# EAGLE board board-newparts-toextract (EAGLE 9.5.2), part 1 of 2
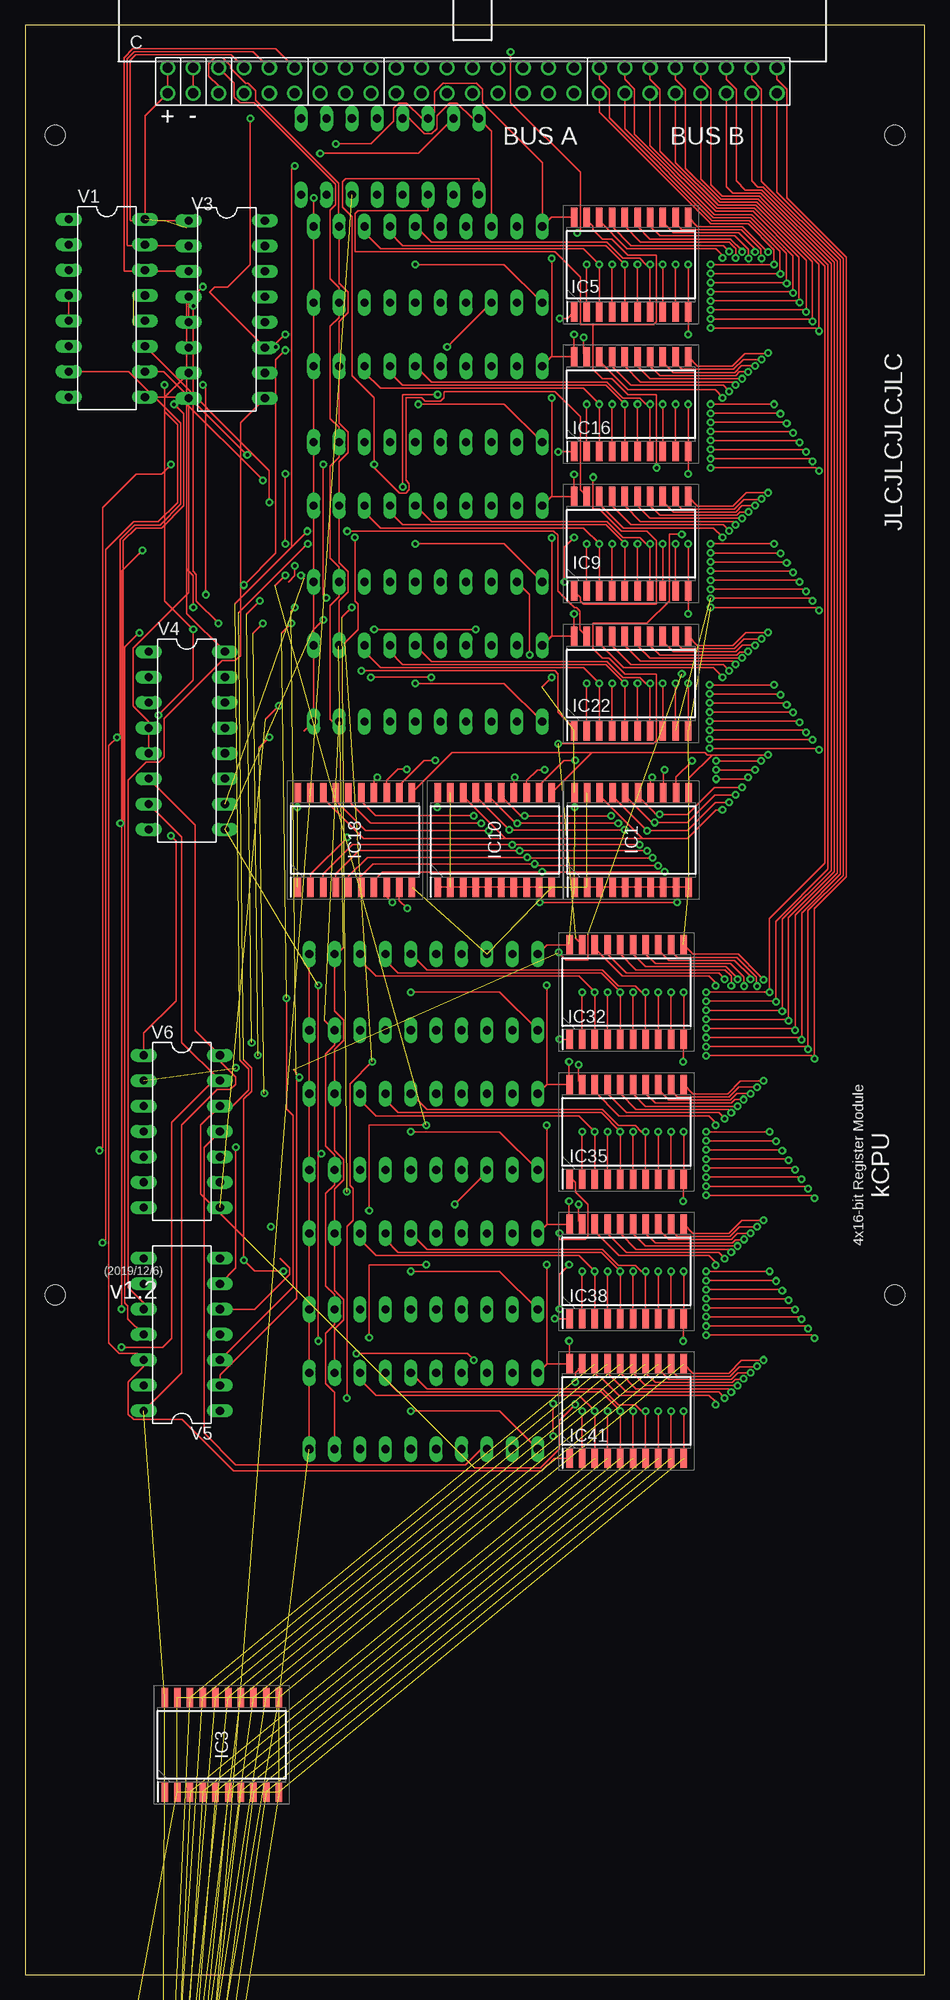
[diagram p0: board, top side]
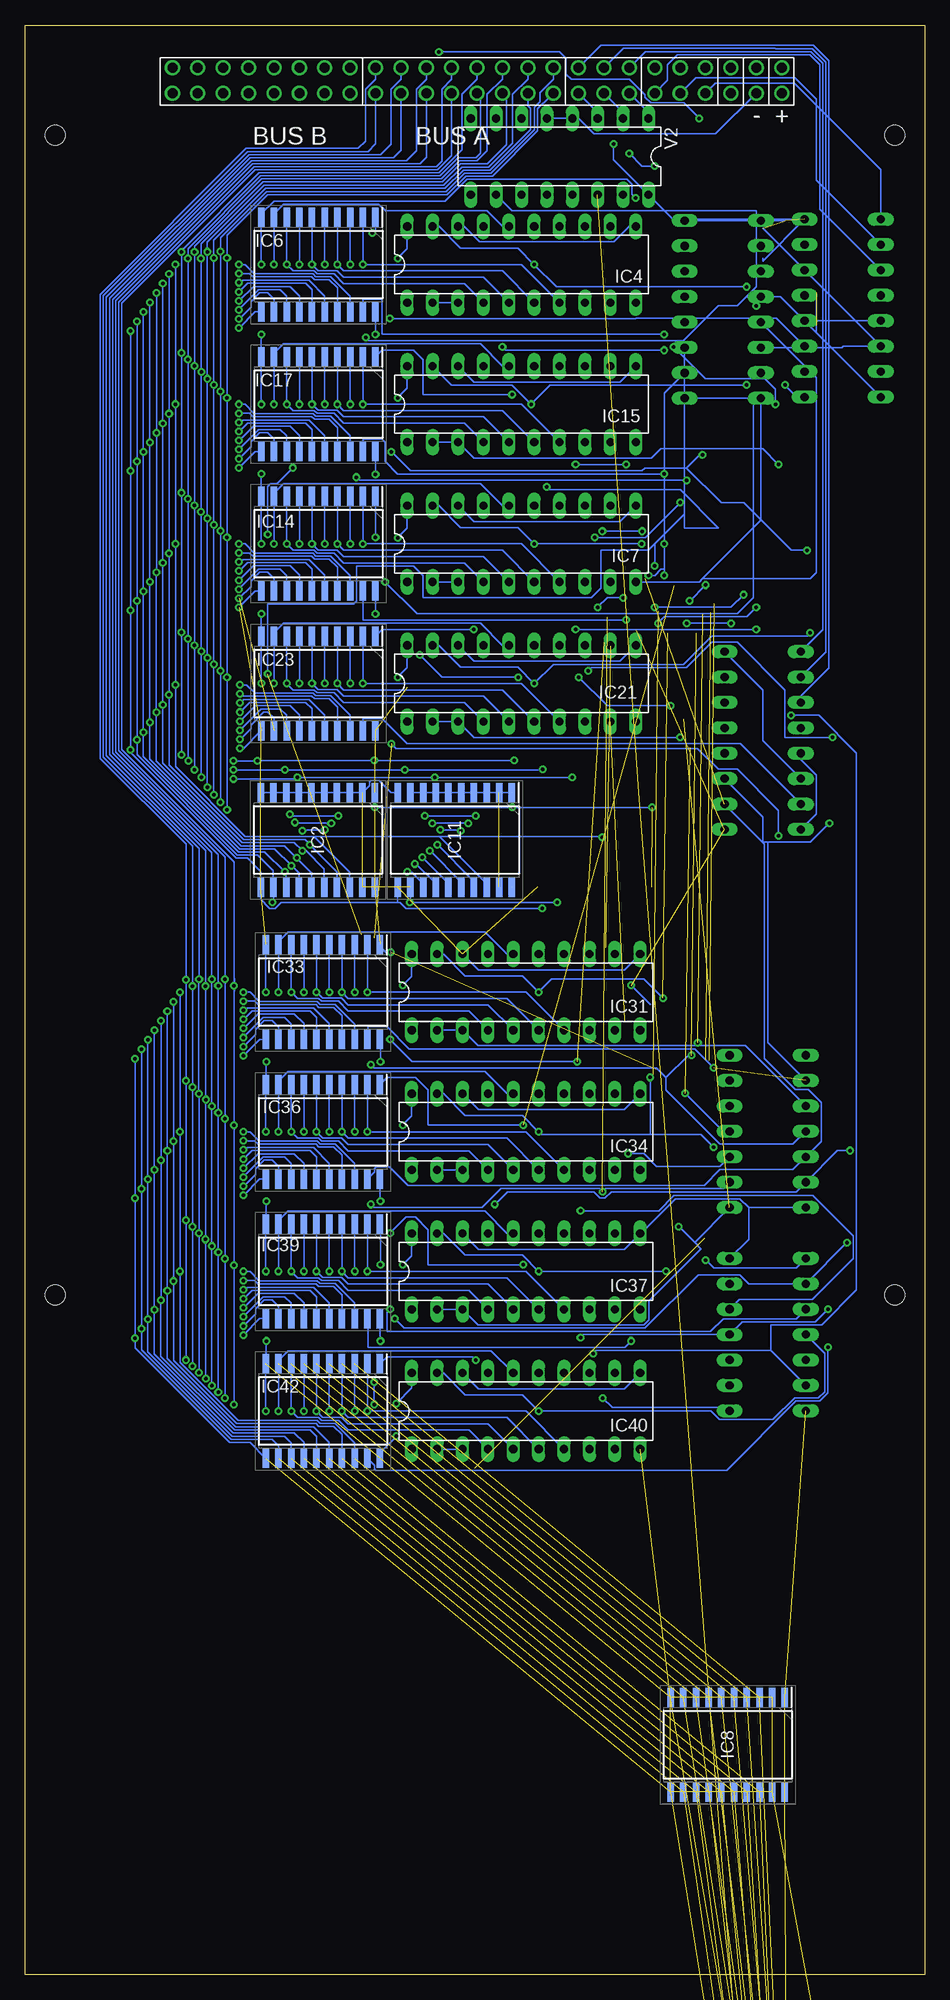
[diagram p1: board, bottom side, seen from below]

Size 90 x 195 mm. Coordinates in mm from the lower left corner, seen from the top.
Outline: 0,0 90,0 90,195 0,195 0,0
Copper layers (1*16): Top 0.035mm / dielectric 1.5mm / Bottom 0.035mm
Design rules "default *": minimum track width 6mil, minimum drill 0.35mm, track to track 6mil, track to pad 6mil, pad to pad 6mil, via to via 6mil, smd to smd 6mil, copper to edge 40mil, drill to drill 6mil, minimum pad ring 10mil, minimum via ring 8mil, stop-mask expansion 4mil, vias tented up to drill 0mil, thermal gap 10mil
Holes 2 mm at 87,184 3,184 3,68 87,68

## Footprints (pad centres in the part's own frame; a part is rotated, then mirrored left to right if it is on the bottom)
PAK100/2500-5-50 = drill 1 pad 1.422: 1 -30.48,-1.27; 2 -30.48,1.27; 3 -27.94,-1.27; 4 -27.94,1.27; 5 -25.4,-1.27; 6 -25.4,1.27; 7 -22.86,-1.27; 8 -22.86,1.27; 9 -20.32,-1.27; 10 -20.32,1.27; 11 -17.78,-1.27; 12 -17.78,1.27; 13 -15.24,-1.27; 14 -15.24,1.27; 15 -12.7,-1.27; 16 -12.7,1.27; 17 -10.16,-1.27; 18 -10.16,1.27; 19 -7.62,-1.27; 20 -7.62,1.27; 21 -5.08,-1.27; 22 -5.08,1.27; 23 -2.54,-1.27; 24 -2.54,1.27; 25 0,-1.27; 26 0,1.27; 27 2.54,-1.27; 28 2.54,1.27; 29 5.08,-1.27; 30 5.08,1.27; 31 7.62,-1.27; 32 7.62,1.27; 33 10.16,-1.27; 34 10.16,1.27; 35 12.7,-1.27; 36 12.7,1.27; 37 15.24,-1.27; 38 15.24,1.27; 39 17.78,-1.27; 40 17.78,1.27; 41 20.32,-1.27; 42 20.32,1.27; 43 22.86,-1.27; 44 22.86,1.27; 45 25.4,-1.27; 46 25.4,1.27; 47 27.94,-1.27; 48 27.94,1.27; 49 30.48,-1.27; 50 30.48,1.27
SOIC127P1030X265-20N = smd 1.95 x 0.65: 1 -4.725,5.715; 2 -4.725,4.445; 3 -4.725,3.175; 4 -4.725,1.905; 5 -4.725,0.635; 6 -4.725,-0.635; 7 -4.725,-1.905; 8 -4.725,-3.175; 9 -4.725,-4.445; 10 -4.725,-5.715; 11 4.725,-5.715; 12 4.725,-4.445; 13 4.725,-3.175; 14 4.725,-1.905; 15 4.725,-0.635; 16 4.725,0.635; 17 4.725,1.905; 18 4.725,3.175; 19 4.725,4.445; 20 4.725,5.715
DIL20 = drill 0.813 long: 1 -11.43,-3.81; 2 -8.89,-3.81; 3 -6.35,-3.81; 4 -3.81,-3.81; 5 -1.27,-3.81; 6 1.27,-3.81; 7 3.81,-3.81; 8 6.35,-3.81; 9 8.89,-3.81; 10 11.43,-3.81; 11 11.43,3.81; 12 8.89,3.81; 13 6.35,3.81; 14 3.81,3.81; 15 1.27,3.81; 16 -1.27,3.81; 17 -3.81,3.81; 18 -6.35,3.81; 19 -8.89,3.81; 20 -11.43,3.81
DIL16 = drill 0.813 long: 1 -8.89,-3.81; 2 -6.35,-3.81; 3 -3.81,-3.81; 4 -1.27,-3.81; 5 1.27,-3.81; 6 3.81,-3.81; 7 6.35,-3.81; 8 8.89,-3.81; 9 8.89,3.81; 10 6.35,3.81; 11 3.81,3.81; 12 1.27,3.81; 13 -1.27,3.81; 14 -3.81,3.81; 15 -6.35,3.81; 16 -8.89,3.81
DIL14 = drill 0.813 long: 1 -7.62,-3.81; 2 -5.08,-3.81; 3 -2.54,-3.81; 4 0,-3.81; 5 2.54,-3.81; 6 5.08,-3.81; 7 7.62,-3.81; 8 7.62,3.81; 9 5.08,3.81; 10 2.54,3.81; 11 0,3.81; 12 -2.54,3.81; 13 -5.08,3.81; 14 -7.62,3.81

## Placement (x,y rotation side)
C  2550-5  [PAK100/2500-5-50]  44.77,189.46 0 top
IC1  SN74CBT3345DW  [SOIC127P1030X265-20N]  60.69,113.5 90 top
IC2  SN74CBT3345DW  [SOIC127P1030X265-20N]  60.69,113.5 270 bottom
IC3  SN74CBT3345DW  [SOIC127P1030X265-20N]  19.69,23 90 top
IC4  74HCT299N  [DIL20]  40.32,171.04 0 bottom
IC5  SN74CBT3345DW  [SOIC127P1030X265-20N]  60.64,171.04 90 top
IC6  SN74CBT3345DW  [SOIC127P1030X265-20N]  60.64,171.04 270 bottom
IC7  74HCT299N  [DIL20]  40.32,143.1 0 bottom
IC8  SN74CBT3345DW  [SOIC127P1030X265-20N]  19.69,23 270 bottom
IC9  SN74CBT3345DW  [SOIC127P1030X265-20N]  60.64,143.1 90 top
IC10  SN74CBT3345DW  [SOIC127P1030X265-20N]  47,113.5 90 top
IC11  SN74CBT3345DW  [SOIC127P1030X265-20N]  47,113.5 270 bottom
IC12  SN74CBT3345DW  [SOIC127P1030X265-20N]  9,-35 0 top  (outside the outline)
IC13  SN74CBT3345DW  [SOIC127P1030X265-20N]  9,-49 0 top  (outside the outline)
IC14  SN74CBT3345DW  [SOIC127P1030X265-20N]  60.64,143.1 270 bottom
IC15  74HCT299N  [DIL20]  40.32,157.07 0 bottom
IC16  SN74CBT3345DW  [SOIC127P1030X265-20N]  60.64,157.07 90 top
IC17  SN74CBT3345DW  [SOIC127P1030X265-20N]  60.64,157.07 270 bottom
IC18  SN74CBT3345DW  [SOIC127P1030X265-20N]  33,113.5 90 top
IC19  SN74CBT3345DW  [SOIC127P1030X265-20N]  9,-77 0 top  (outside the outline)
IC21  74HCT299N  [DIL20]  40.32,129.13 0 bottom
IC22  SN74CBT3345DW  [SOIC127P1030X265-20N]  60.64,129.13 90 top
IC23  SN74CBT3345DW  [SOIC127P1030X265-20N]  60.64,129.13 270 bottom
IC31  74HCT299N  [DIL20]  39.87,98.27 0 bottom
IC32  SN74CBT3345DW  [SOIC127P1030X265-20N]  60.19,98.27 90 top
IC33  SN74CBT3345DW  [SOIC127P1030X265-20N]  60.19,98.27 270 bottom
IC34  74HCT299N  [DIL20]  39.87,84.3 0 bottom
IC35  SN74CBT3345DW  [SOIC127P1030X265-20N]  60.19,84.3 90 top
IC36  SN74CBT3345DW  [SOIC127P1030X265-20N]  60.19,84.3 270 bottom
IC37  74HCT299N  [DIL20]  39.87,70.33 0 bottom
IC38  SN74CBT3345DW  [SOIC127P1030X265-20N]  60.19,70.33 90 top
IC39  SN74CBT3345DW  [SOIC127P1030X265-20N]  60.19,70.33 270 bottom
IC40  74HCT299N  [DIL20]  39.87,56.36 0 bottom
IC41  SN74CBT3345DW  [SOIC127P1030X265-20N]  60.19,56.36 90 top
IC42  SN74CBT3345DW  [SOIC127P1030X265-20N]  60.19,56.36 270 bottom
V1  74238N  [DIL16]  8.19,166.68 270 top
V2  74138N  [DIL16]  36.51,181.84 180 bottom
V3  74238N  [DIL16]  20.19,166.55 270 top
V4  74138N  [DIL16]  16.19,123.42 270 top
V5  7432N  [DIL14]  15.69,64.01 90 top
V6  7408N  [DIL14]  15.69,84.33 270 top

## Library data of the parts
C = con-3m; OC_FARNELL: 1788696; OC_NEWARK: unknown
IC1-IC3 IC5 IC6 IC8-IC14 IC16-IC19 IC22 IC23 IC32 IC33 IC35 IC36 IC38 IC39 IC41 IC42 = SamacSys_Parts; DESCRIPTION: Texas Instruments SN74CBT3345DW, Bus Switch, 8 x 1:1, 4.5 5.5 V, 20-Pin SOIC; HEIGHT: 2.65mm; MANUFACTURER_NAME: Texas Instruments; MANUFACTURER_PART_NUMBER: SN74CBT3345DW
IC4 IC7 IC15 IC21 IC31 IC34 IC37 IC40 = 74xx-eu
V1-V6 = 74ttl-din

## Nets
BUSA_BIT0: C.19 IC1.18 IC5.18 IC9.18 IC10.18 IC16.18 IC18.18 IC22.18
BUSA_BIT1: C.20 IC1.17 IC5.17 IC9.17 IC10.17 IC16.17 IC18.17 IC22.17
BUSA_BIT2: C.21 IC1.16 IC5.16 IC9.16 IC10.16 IC16.16 IC18.16 IC22.16
BUSA_BIT3: C.22 IC1.15 IC5.15 IC9.15 IC10.15 IC16.15 IC18.15 IC22.15
BUSA_BIT4: C.23 IC1.14 IC5.14 IC9.14 IC10.14 IC16.14 IC18.14 IC22.14
BUSA_BIT5: C.24 IC1.13 IC5.13 IC9.13 IC10.13 IC16.13 IC18.13 IC22.13
BUSA_BIT6: C.25 IC1.12 IC5.12 IC9.12 IC10.12 IC16.12 IC18.12 IC22.12
BUSA_BIT7: C.26 IC1.11 IC5.11 IC9.11 IC10.11 IC16.11 IC18.11 IC22.11
BUSA_BIT8: C.27 IC3.18 IC12.18 IC19.18 IC32.18 IC35.18 IC38.18 IC41.18
BUSA_BIT9: C.28 IC3.17 IC12.17 IC19.17 IC32.17 IC35.17 IC38.17 IC41.17
BUSA_BIT10: C.29 IC3.16 IC12.16 IC19.16 IC32.16 IC35.16 IC38.16 IC41.16
BUSA_BIT11: C.30 IC3.15 IC12.15 IC19.15 IC32.15 IC35.15 IC38.15 IC41.15
BUSA_BIT12: C.31 IC3.14 IC12.14 IC19.14 IC32.14 IC35.14 IC38.14 IC41.14
BUSA_BIT13: C.32 IC3.13 IC12.13 IC19.13 IC32.13 IC35.13 IC38.13 IC41.13
BUSA_BIT14: C.33 IC3.12 IC12.12 IC19.12 IC32.12 IC35.12 IC38.12 IC41.12
BUSA_BIT15: C.34 IC3.11 IC12.11 IC19.11 IC32.11 IC35.11 IC38.11 IC41.11
BUSA_REGIN0: C.7 V1.1
BUSA_REGIN1: C.9 V1.2
BUSA_REGIN2: C.11 V1.3
BUSA_REGOUT0: C.13 V2.1
BUSA_REGOUT1: C.15 V2.2
BUSA_REGOUT2: C.17 V2.3
BUSB_BIT0: C.35 IC2.18 IC6.18 IC11.18 IC14.18 IC17.18 IC18.2 IC23.18
BUSB_BIT1: C.36 IC2.17 IC6.17 IC11.17 IC14.17 IC17.17 IC18.3 IC23.17
BUSB_BIT2: C.37 IC2.16 IC6.16 IC11.16 IC14.16 IC17.16 IC18.4 IC23.16
BUSB_BIT3: C.38 IC2.15 IC6.15 IC11.15 IC14.15 IC17.15 IC18.5 IC23.15
BUSB_BIT4: C.39 IC2.14 IC6.14 IC11.14 IC14.14 IC17.14 IC18.6 IC23.14
BUSB_BIT5: C.40 IC2.13 IC6.13 IC11.13 IC14.13 IC17.13 IC18.7 IC23.13
BUSB_BIT6: C.41 IC2.12 IC6.12 IC11.12 IC14.12 IC17.12 IC18.8 IC23.12
BUSB_BIT7: C.42 IC2.11 IC6.11 IC11.11 IC14.11 IC17.11 IC18.9 IC23.11
BUSB_BIT8: C.43 IC8.18 IC13.18 IC19.2 IC33.18 IC36.18 IC39.18 IC42.18
BUSB_BIT9: C.44 IC8.17 IC13.17 IC19.3 IC33.17 IC36.17 IC39.17 IC42.17
BUSB_BIT10: C.45 IC8.16 IC13.16 IC19.4 IC33.16 IC36.16 IC39.16 IC42.16
BUSB_BIT11: C.46 IC8.15 IC13.15 IC19.5 IC33.15 IC36.15 IC39.15 IC42.15
BUSB_BIT12: C.47 IC8.14 IC13.14 IC19.6 IC33.14 IC36.14 IC39.14 IC42.14
BUSB_BIT13: C.48 IC8.13 IC13.13 IC19.7 IC33.13 IC36.13 IC39.13 IC42.13
BUSB_BIT14: C.49 IC8.12 IC13.12 IC19.8 IC33.12 IC36.12 IC39.12 IC42.12
BUSB_BIT15: C.50 IC8.11 IC13.11 IC19.9 IC33.11 IC36.11 IC39.11 IC42.11
BUSB_REGIN0: C.8 V3.1
BUSB_REGIN1: C.10 V3.2
BUSB_REGIN2: C.12 V3.3
BUSB_REGOUT0: C.14 V4.1
BUSB_REGOUT1: C.16 V4.2
BUSB_REGOUT2: C.18 V4.3
CLK: C.5 IC4.12 IC7.12 IC15.12 IC21.12 IC31.12 IC34.12 IC37.12 IC40.12
GND: C.3 C.4 IC1.2 IC1.3 IC1.4 IC1.5 IC1.6 IC1.7 IC1.8 IC1.9 IC1.10 IC2.2 IC2.3 IC2.4 IC2.5 IC2.6 IC2.7 IC2.8 IC2.9 IC2.10 IC3.2 IC3.3 IC3.4 IC3.5 IC3.6 IC3.7 IC3.8 IC3.9 IC3.10 IC4.10 IC4.11 IC4.18 IC5.10 IC6.10 IC7.10 IC7.11 IC7.18 IC8.2 IC8.3 IC8.4 IC8.5 IC8.6 IC8.7 IC8.8 IC8.9 IC8.10 IC9.10 IC10.10 IC11.10 IC12.10 IC13.10 IC14.10 IC15.10 IC15.11 IC15.18 IC16.10 IC17.10 IC18.10 IC19.10 IC21.10 IC21.11 IC21.18 IC22.10 IC23.10 IC31.10 IC31.11 IC31.18 IC32.10 IC33.10 IC34.10 IC34.11 IC34.18 IC35.10 IC36.10 IC37.10 IC37.11 IC37.18 IC38.10 IC39.10 IC40.10 IC40.11 IC40.18 IC41.10 IC42.10 V1.4 V1.5 V1.8 V2.4 V2.5 V2.8 V3.4 V3.5 V3.8 V4.4 V4.5 V4.8 V5.7 V6.7
N$1: IC34.16 IC35.9 IC36.9
N$2: IC16.1 IC35.1 V1.10 V5.4
N$3: IC16.19 IC35.19 V2.10 V6.4
N$4: IC4.2 IC4.3 IC31.2 IC31.3 V6.3
N$5: IC4.7 IC5.2 IC6.2
N$6: IC4.13 IC5.3 IC6.3
N$7: IC4.6 IC5.4 IC6.4
N$8: IC4.14 IC5.5 IC6.5
N$9: IC4.5 IC5.6 IC6.6
N$10: IC4.15 IC5.7 IC6.7
N$11: IC4.4 IC5.8 IC6.8
N$12: IC5.1 IC32.1 V1.11 V5.1
N$13: IC3.19 IC8.19
N$14: IC5.19 IC32.19 V2.11 V6.1
N$15: IC4.16 IC5.9 IC6.9
N$17: IC6.19 IC33.19 V4.11 V6.2
N$18: IC15.1 IC15.19 IC34.1 IC34.19 V5.6
N$19: IC15.2 IC15.3 IC34.2 IC34.3 V6.6
N$20: IC4.1 IC4.19 IC31.1 IC31.19 V5.3
N$22: IC7.7 IC9.2 IC14.2
N$23: IC7.13 IC9.3 IC14.3
N$24: IC7.6 IC9.4 IC14.4
N$25: IC7.14 IC9.5 IC14.5
N$26: IC17.1 IC36.1 V3.10 V5.5
N$27: IC17.19 IC36.19 V4.10 V6.5
N$28: IC7.5 IC9.6 IC14.6
N$29: IC14.1 IC39.1 V3.9 V5.10
N$30: IC7.1 IC7.19 IC37.1 IC37.19 V5.8
N$31: IC7.2 IC7.3 IC37.2 IC37.3 V6.8
N$32: IC23.1 IC42.1 V3.7 V5.13
N$33: IC9.1 IC38.1 V1.9 V5.9
N$34: IC9.19 IC38.19 V2.9 V6.9
N$35: IC7.15 IC9.7 IC14.7
N$36: IC7.4 IC9.8 IC14.8
N$37: IC7.16 IC9.9 IC14.9
N$39: V2.12
N$40: IC14.19 IC39.19 V4.9 V6.10
N$41: IC15.7 IC16.2 IC17.2
N$42: IC15.13 IC16.3 IC17.3
N$43: IC15.6 IC16.4 IC17.4
N$44: IC15.14 IC16.5 IC17.5
N$45: IC15.5 IC16.6 IC17.6
N$46: IC15.15 IC16.7 IC17.7
N$47: IC15.4 IC16.8 IC17.8
N$48: IC15.16 IC16.9 IC17.9
N$50: IC21.1 IC21.19 IC40.1 IC40.19 V5.11
N$51: IC22.1 IC41.1 V1.7 V5.12
N$52: IC23.19 IC42.19 V4.7 V6.13
N$53: V4.12
N$54: IC18.19 IC19.19 V2.14
N$55: IC22.19 IC41.19 V2.7 V6.12
N$56: IC1.19 IC2.19
N$57: V2.13
N$58: IC12.19 IC13.19
N$59: V4.13
N$60: IC10.19 IC11.19
N$63: IC21.7 IC22.2 IC23.2
N$64: IC21.13 IC22.3 IC23.3
N$65: IC21.6 IC22.4 IC23.4
N$66: IC21.14 IC22.5 IC23.5
N$67: IC21.5 IC22.6 IC23.6
N$68: IC21.15 IC22.7 IC23.7
N$69: IC21.4 IC22.8 IC23.8
N$70: IC21.16 IC22.9 IC23.9
N$121: IC31.7 IC32.2 IC33.2
N$122: IC31.13 IC32.3 IC33.3
N$125: IC31.6 IC32.4 IC33.4
N$126: IC31.14 IC32.5 IC33.5
N$129: IC31.5 IC32.6 IC33.6
N$130: IC31.15 IC32.7 IC33.7
N$131: IC31.4 IC32.8 IC33.8
N$132: IC31.16 IC32.9 IC33.9
N$133: IC34.7 IC35.2 IC36.2
N$134: IC34.13 IC35.3 IC36.3
N$135: IC34.6 IC35.4 IC36.4
N$136: IC34.14 IC35.5 IC36.5
N$139: IC34.5 IC35.6 IC36.6
N$140: IC34.15 IC35.7 IC36.7
N$141: IC34.4 IC35.8 IC36.8
N$143: IC37.7 IC38.2 IC39.2
N$144: IC37.13 IC38.3 IC39.3
N$145: IC37.6 IC38.4 IC39.4
N$146: IC37.14 IC38.5 IC39.5
N$149: IC37.5 IC38.6 IC39.6
N$150: IC37.15 IC38.7 IC39.7
N$151: IC37.4 IC38.8 IC39.8
N$152: IC37.16 IC38.9 IC39.9
N$153: IC40.7 IC41.2 IC42.2
N$154: IC40.13 IC41.3 IC42.3
N$155: IC40.6 IC41.4 IC42.4
N$156: IC40.14 IC41.5 IC42.5
N$157: IC21.2 IC21.3 IC40.2 IC40.3 V6.11
N$159: IC40.5 IC41.6 IC42.6
N$160: IC40.15 IC41.7 IC42.7
N$161: IC40.4 IC41.8 IC42.8
N$162: IC40.16 IC41.9 IC42.9
N$163: IC6.1 IC33.1 V3.11 V5.2
STARTUP: C.6 IC4.9 IC7.9 IC15.9 IC21.9 IC31.9 IC34.9 IC37.9 IC40.9
VCC: C.1 C.2 IC1.1 IC1.20 IC2.1 IC2.20 IC3.1 IC3.20 IC4.20 IC5.20 IC6.20 IC7.20 IC8.1 IC8.20 IC9.20 IC10.1 IC10.2 IC10.3 IC10.4 IC10.5 IC10.6 IC10.7 IC10.8 IC10.9 IC10.20 IC11.1 IC11.2 IC11.3 IC11.4 IC11.5 IC11.6 IC11.7 IC11.8 IC11.9 IC11.20 IC12.1 IC12.2 IC12.3 IC12.4 IC12.5 IC12.6 IC12.7 IC12.8 IC12.9 IC12.20 IC13.1 IC13.2 IC13.3 IC13.4 IC13.5 IC13.6 IC13.7 IC13.8 IC13.9 IC13.20 IC14.20 IC15.20 IC16.20 IC17.20 IC18.1 IC18.20 IC19.1 IC19.20 IC21.20 IC22.20 IC23.20 IC31.20 IC32.20 IC33.20 IC34.20 IC35.20 IC36.20 IC37.20 IC38.20 IC39.20 IC40.20 IC41.20 IC42.20 V1.6 V1.16 V2.6 V2.16 V3.6 V3.16 V4.6 V4.16 V5.14 V6.14

## Tracks (layer width: path | path; a pad name or v marks a point on that pad's centre or on a via)
BUSA_BIT0  (via drill 0.35)
  Top 0.152: v69.78,171.68 69.78,172 69.13,172.65 60.24,172.65 57.38,175.51 57.34,175.51 IC5.18 | v69.78,157.71 69.78,157.78 69.06,158.5 60.35,158.5 57.34,161.51 IC16.18 | v69.78,143.74 69.78,143.81 68.9,144.69 59.89,144.69 57.45,147.14 57.45,147.85 57.47,147.87 IC9.18 | v69.78,129.77 69.78,129.84 68.9,130.72 59.89,130.72 57.47,133.15 IC22.18 | 61.77,113.62 66.25,113.62 69.13,116.5 v69.78,116.5 | IC1.18 57.52,117.87 61.77,113.62 | 61.77,113.62 48.08,113.62 | IC10.18 43.83,117.87 48.08,113.62 | 48.08,113.62 33.88,113.62 29.82,117.67 IC18.18
  Bottom 0.152: C.19 38.14,187.2 38.15,187.2 38.71,186.64 38.71,184.41 43.23,179.88 45.9,179.88 47.75,178.03 65.72,178.03 69.78,173.97 v69.78,171.68 v69.78,157.71 v69.78,143.74 v69.78,129.77 v69.78,116.5
BUSA_BIT1  (via drill 0.35)
  Top 0.152: v70.44,172.33 70.44,172.36 69.85,172.95 60.64,172.95 58.74,174.85 IC5.17 | v70.44,158.36 70.44,158.39 69.85,158.98 60.64,158.98 58.74,160.88 IC16.17 | v70.44,144.39 70.44,144.42 69.85,145.01 60.64,145.01 58.74,146.91 IC9.17 | v70.44,130.42 70.44,130.45 69.85,131.04 60.64,131.04 58.74,132.94 IC22.17 | IC1.17 58.79,117.87 v62.24,114.42 66.25,114.42 69.08,117.25 v70.44,117.25 | IC10.17 45.09,117.87 v48.47,114.5 v60,114.5 | v46.42,114.42 34.08,114.42 31.09,117.41 IC18.17
  Bottom 0.152: C.20 37.15,189.58 38.48,188.25 38.48,187.3 39.01,186.77 39.01,184.53 43.36,180.19 46.02,180.19 47.88,178.34 65.85,178.34 70.44,173.74 v70.44,172.33 v70.44,158.36 v70.44,144.39 v70.44,130.42 v70.44,117.25 | v60,114.5 62.16,114.5 v62.24,114.42 | v48.47,114.5 46.5,114.5 v46.42,114.42
BUSA_BIT2  (via drill 0.35)
  Top 0.152: v71.12,171.68 71.12,172.63 70.48,173.27 61.59,173.27 60.01,174.85 IC5.16 | v71.12,158.98 70.8,159.3 61.59,159.3 60.01,160.88 IC16.16 | v71.12,145.01 70.8,145.33 61.59,145.33 60.01,146.91 IC9.16 | v71.12,131.04 70.8,131.36 61.59,131.36 60.01,132.94 IC22.16 | IC1.16 60.06,117.87 62.7,115.23 v63,115.23 66.25,115.23 69.02,118 v71.12,118 | v59.37,115.16 v49.25,115.16 49.08,115.16 46.37,117.87 IC10.16 | v45.67,115.17 34.58,115.17 32.25,117.5 32.25,118.11 IC18.16
  Bottom 0.152: C.21 39.69,186.93 39.43,186.68 39.43,184.54 43.48,180.49 46.15,180.49 47.98,178.66 65.95,178.66 71.12,173.49 v71.12,171.68 v71.12,158.98 v71.12,145.01 v71.12,131.04 v71.12,118 | v59.37,115.16 62.93,115.16 v63,115.23 | v49.25,115.16 v45.68,115.16 v45.67,115.17
BUSA_BIT3  (via drill 0.35)
  Top 0.152: IC5.15 61.28,174.85 62.53,173.6 70.59,173.6 71.76,172.42 v71.76,172.32 | IC16.15 61.28,160.88 62.53,159.63 v71.76,159.63 v71.76,159.62 | IC9.15 61.28,146.91 62.53,145.66 v71.76,145.66 v71.76,145.65 | IC22.15 61.28,132.94 62.54,131.68 v71.76,131.68 | v71.76,118.75 v71.76,118.74 68.96,118.74 66.25,116.03 v63.5,116.03 63.17,116.03 61.33,117.87 IC1.15 | IC10.15 47.68,118.18 47.68,117.83 49.62,115.89 v50,115.89 v58.64,115.89 | v44.92,115.92 35.08,115.92 33.5,117.5 33.5,118.09 IC18.15
  Bottom 0.152: C.22 39.69,189.58 41.21,188.06 41.21,183.2 43.61,180.8 46.28,180.8 48.1,178.97 66.07,178.97 71.76,173.28 v71.76,172.32 v71.76,159.62 v71.76,145.65 v71.76,131.68 v71.76,118.75 | v58.64,115.89 63.36,115.89 v63.5,116.03 | v50,115.89 44.95,115.89 v44.92,115.92
BUSA_BIT4  (via drill 0.35, 0.35 pad 0.55)
  Top 0.152: IC5.14 62.55,174.85 63.5,173.9 71.04,173.9 72.37,172.57 72.37,171.67 v72.39,171.65 | IC16.14 62.55,160.88 63.5,159.93 71.12,159.93 71.49,160.3 v72.37,160.3 | IC9.14 62.55,146.91 63.5,145.96 71.21,145.96 71.51,146.26 72.35,146.26 v72.39,146.31 | IC22.14 62.55,132.94 63.5,131.99 71.21,131.99 71.51,132.29 72.3,132.29 v72.37,132.36 | 62.6,117.87 IC1.14 | v69.17,119.58 72.19,119.58 v72.37,119.75 | IC1.14 62.75,118.38 | IC1.14 62.6,119.58 v62.75,119.73 | IC10.14 48.91,119.66 v49,119.75 | 34.91,119.01 IC18.14 34.91,119.41 v35.25,119.75
  Bottom 0.152: 72.37,146.33 v72.37,132.36 v72.37,119.75 | v72.39,146.31 72.37,146.33 | 72.37,146.33 v72.37,160.3 72.37,171.63 v72.39,171.65 72.37,171.67 72.37,173.11 66.17,179.3 48.2,179.3 46.4,181.1 43.74,181.1 41.82,183.02 41.82,187.78 C.23 | v69.17,119.58 62.91,119.58 v62.75,119.73 62.73,119.75 v49,119.75 v35.25,119.75
BUSA_BIT5  (via drill 0.35, 0.35 pad 0.55)
  Top 0.152: IC5.13 63.82,175.25 64.85,174.22 71.44,174.22 73.03,172.63 v73.03,172.31 | IC16.13 63.82,161.28 64.85,160.25 71.01,160.25 71.66,160.91 72.62,160.91 72.63,160.9 v73.06,160.9 | IC9.13 63.82,147.31 64.85,146.28 71.1,146.28 71.73,146.91 73.02,146.91 v73.05,146.94 | IC22.13 63.82,133.34 64.85,132.31 71.1,132.31 71.76,132.97 v73.05,132.97 | 63.87,117.87 IC1.13 63.87,120.37 v64,120.5 | v69.17,120.48 73.03,120.48 v73.05,120.5 | IC10.13 50.17,119.42 51.25,120.5 v52,120.5 | IC18.13 36.17,119.42 37.3,120.55 v38.2,120.55
  Bottom 0.152: 73.05,160.57 v73.05,146.94 v73.05,132.97 v73.05,120.5 | 73.05,160.57 73.06,160.58 v73.06,160.9 | C.24 42.23,189.58 43.75,188.06 43.75,182.42 44.77,181.41 46.53,181.41 48.33,179.6 66.3,179.6 73.05,172.86 73.05,172.29 | 73.05,172.29 v73.03,172.31 | 73.05,160.57 73.05,172.29 | v69.17,120.48 64.02,120.48 v64,120.5 v52,120.5 38.25,120.5 v38.2,120.55
BUSA_BIT6  (via drill 0.35, 0.35 pad 0.55)
  Top 0.152: IC5.12 65.09,175.16 65.72,174.53 71.67,174.53 73.63,172.57 73.63,171.71 v73.69,171.65 | IC16.12 65.09,161.19 65.72,160.56 70.88,160.56 71.86,161.53 v73.71,161.53 | IC9.12 65.09,147.22 65.72,146.59 70.97,146.59 71.93,147.54 73.66,147.54 v73.69,147.58 | IC22.12 65.09,133.25 65.72,132.62 70.97,132.62 71.93,133.57 73.66,133.57 v73.69,133.61 | 65.14,117.87 IC1.12 65.14,119.78 v66.75,121.39 | v69.17,121.39 v73.66,121.39 | IC10.12 51.45,118.94 53.93,121.43 v55.07,121.43 | v41.07,121.43 39.93,121.43 37.45,118.94 IC18.12
  Bottom 0.152: v73.69,133.61 v73.69,147.58 73.69,161.84 | v73.69,133.61 | 73.69,161.84 73.71,161.82 v73.71,161.53 | C.25 44.45,187.87 44.45,182.16 44.9,181.71 46.66,181.71 48.46,179.91 66.43,179.91 73.69,172.65 v73.69,171.65 73.69,171.68 | 73.69,171.68 73.69,161.84 | 73.69,171.68 | v66.75,121.39 67,121.39 | 67,121.39 v69.17,121.39 | 55.11,121.39 v55.07,121.43 | v55.07,121.43 66.96,121.43 67,121.39 | v73.69,133.61 73.69,121.43 v73.66,121.39 | v55.07,121.43 v41.07,121.43
BUSA_BIT7  (via drill 0.35, 0.35 pad 0.55)
  Top 0.152: IC5.11 67.3,174.83 71.8,174.83 73.94,172.69 v74.33,172.29 | IC9.11 67.3,146.89 70.85,146.89 72.18,148.22 v74.33,148.22 | IC22.11 67.3,132.92 70.85,132.92 72.15,134.22 74.3,134.22 v74.33,134.25 | IC16.11 67.3,160.86 70.75,160.86 72.04,162.14 74.28,162.14 v74.33,162.19 | v74.33,148.22 | v74.33,122 68.75,122 | IC10.11 56.74,122.25 | 56.74,122.25 68,122.25 68.25,122 68.75,122 | IC1.11 66.41,119.66 68.75,122 | 56.74,122.25 42.74,122.25 IC18.11
  Bottom 0.152: v74.33,148.22 v74.33,134.25 v74.33,122 | v74.33,148.22 | v74.33,148.22 v74.33,162.19 | v74.33,162.19 | C.26 44.77,189.58 46.29,188.06 46.29,182.51 48.58,180.21 66.55,180.21 74.33,172.44 v74.33,172.29 | v74.33,172.29 | v74.33,172.29 v74.33,162.19
BUSA_BIT8  (via drill 0.35)  (3 unrouted)
  Top 0.152: v69.08,98.9 69.08,99.22 68.44,99.87 59.79,99.87 56.93,102.73 56.89,102.73 IC32.18 | v69.08,84.93 69.08,85.25 68.45,85.88 59.45,85.88 57.02,88.31 IC35.18 | v69.08,70.96 69.08,71.28 68.45,71.91 59.45,71.91 57.09,74.27 57.09,74.99 IC38.18 | v69.08,56.99 69.08,57.31 68.45,57.94 59.45,57.94 57.54,59.85 57.34,59.85 57.02,60.17 IC41.18
  Bottom 0.152: 69.08,98.3 v69.08,98.9 69.08,111.29 80.33,122.53 80.33,167.16 66.97,180.52 48.71,180.52 47.31,181.92 C.27 | 69.08,98.3 v69.08,84.93 v69.08,70.96 v69.08,56.99 | 69.08,98.3 69.03,98.35 69.03,99.64
BUSA_BIT9  (via drill 0.35)  (3 unrouted)
  Top 0.152: v69.99,99.55 69.99,99.58 69.4,100.17 60.19,100.17 58.29,102.08 IC32.17 | v69.99,85.58 69.99,85.61 69.4,86.2 60.19,86.2 58.29,88.11 IC35.17 | v69.99,71.61 69.99,71.64 69.4,72.23 60.19,72.23 58.29,74.14 IC38.17 | v69.99,57.64 69.99,57.67 69.4,58.26 60.19,58.26 58.29,60.17 IC41.17
  Bottom 0.152: v69.99,57.64 v69.99,71.61 v69.99,85.58 69.99,99.25 | 69.99,99.25 v69.99,99.55 69.99,111.77 80.63,122.41 80.63,167.28 67.09,180.82 48.84,180.82 48.29,181.37 48.29,188.6 47.31,189.58 C.28 | 69.98,99.64 69.98,99.26 69.99,99.25
BUSA_BIT10  (via drill 0.35)  (3 unrouted)
  Top 0.152: v70.67,98.9 70.67,99.85 70.04,100.49 61.15,100.49 59.56,102.08 IC32.16 | v70.67,86.2 70.35,86.52 61.15,86.52 59.56,88.11 IC35.16 | v70.67,72.23 70.35,72.55 61.15,72.55 59.56,74.14 IC38.16 | v70.67,58.26 70.35,58.58 61.15,58.58 59.56,60.17 IC41.16
  Bottom 0.152: v70.67,58.26 v70.67,72.23 v70.67,86.2 v70.67,98.9 70.67,112.02 80.94,122.28 80.94,167.41 67.22,181.13 50.48,181.13 49.85,181.76 C.29
BUSA_BIT11  (via drill 0.35)  (3 unrouted)
  Top 0.152: IC32.15 60.83,102.08 62.09,100.82 70.14,100.82 71.31,99.64 v71.31,99.54 | IC35.15 60.83,88.11 62.09,86.85 v71.31,86.85 v71.31,86.84 | IC38.15 60.83,74.14 62.09,72.88 v71.31,72.88 v71.31,72.87 | IC41.15 60.83,60.17 62.09,58.9 v71.31,58.9
  Bottom 0.152: v71.31,58.9 v71.31,72.87 v71.31,86.84 v71.31,99.54 71.31,112.23 81.24,122.16 81.24,167.54 67.34,181.43 51.84,181.43 50.83,182.44 50.83,188.6 49.85,189.58 C.30
BUSA_BIT12  (via drill 0.35, 0.35 pad 0.55)  (3 unrouted)
  Top 0.152: IC32.14 62.1,102.08 63.05,101.12 70.59,101.12 71.92,99.8 71.92,98.89 v71.94,98.87 | IC35.14 62.1,88.11 63.05,87.15 70.67,87.15 71.04,87.52 v71.92,87.52 | IC38.14 62.1,74.14 63.05,73.18 70.77,73.18 71.06,73.48 71.9,73.48 v71.95,73.53 | IC41.14 62.1,60.17 63.05,59.21 70.77,59.21 71.06,59.51 71.85,59.51 v71.92,59.58
  Bottom 0.152: v71.92,59.58 71.92,73.55 | v71.95,73.53 71.92,73.55 | 71.92,73.55 v71.92,87.52 71.92,98.85 v71.94,98.87 71.94,112.42 81.55,122.03 81.55,167.66 67.47,181.74 53.12,181.74 52.39,182.47 C.31
BUSA_BIT13  (via drill 0.35, 0.35 pad 0.55)  (3 unrouted)
  Top 0.152: IC32.13 63.37,102.47 64.4,101.44 70.99,101.44 72.58,99.85 v72.58,99.54 | IC35.13 63.37,88.5 64.4,87.47 70.56,87.47 71.22,88.13 72.17,88.13 72.18,88.12 v72.61,88.12 | IC38.13 63.37,74.53 64.4,73.5 70.65,73.5 71.28,74.13 72.57,74.13 v72.6,74.16 | IC41.13 63.37,60.56 64.4,59.53 70.65,59.53 71.31,60.19 v72.6,60.19
  Bottom 0.152: v72.6,60.19 v72.6,74.16 72.6,88.11 v72.61,88.12 72.61,99.5 v72.58,99.54 72.58,112.63 81.85,121.9 81.85,167.79 67.6,182.04 54.41,182.04 53.37,183.08 53.37,188.6 52.39,189.58 C.32
BUSA_BIT14  (via drill 0.35, 0.35 pad 0.55)  (3 unrouted)
  Top 0.152: IC32.12 64.64,102.38 65.27,101.75 71.22,101.75 73.18,99.79 73.18,98.93 v73.24,98.87 | IC35.12 64.64,88.41 65.27,87.78 70.43,87.78 71.41,88.76 v73.26,88.76 | IC38.12 64.64,74.44 65.27,73.81 70.53,73.81 71.49,74.77 73.21,74.77 v73.24,74.8 | IC41.12 64.64,60.47 65.27,59.84 70.53,59.84 71.49,60.8 73.21,60.8 v73.24,60.83
  Bottom 0.152: v73.24,60.83 v73.24,74.8 73.24,89.06 | v73.24,60.83 | 73.24,89.06 v73.24,98.87 | 73.24,89.06 73.26,89.04 v73.26,88.76 | v73.24,98.87 | C.33 54.93,183.11 55.69,182.35 67.72,182.35 82.16,167.92 82.16,121.78 73.24,112.86 v73.24,98.87
BUSA_BIT15  (via drill 0.35, 0.35 pad 0.55)  (3 unrouted)
  Top 0.152: IC32.11 66.85,102.05 71.35,102.05 73.49,99.91 v73.89,99.52 | IC38.11 66.85,74.11 70.4,74.11 71.73,75.44 v73.89,75.44 | IC41.11 66.85,60.14 70.4,60.14 71.7,61.44 73.85,61.44 v73.89,61.47 | IC35.11 66.85,88.08 70.31,88.08 71.59,89.36 73.83,89.36 v73.89,89.41 | v73.89,75.44
  Bottom 0.152: v73.89,61.47 v73.89,75.44 | v73.89,75.44 | v73.89,75.44 v73.89,89.41 | v73.89,89.41 | v73.89,99.52 | v73.89,89.41 v73.89,99.52 | C.34 54.93,189.58 55.91,188.6 55.91,183.4 56.66,182.65 67.85,182.65 82.46,168.04 82.46,121.65 73.89,113.07 v73.89,99.52
BUSA_REGIN0
  Bottom 0.152: V1.1 4.38,180.51 13.05,189.17 20.93,189.17 C.7
BUSA_REGIN1
  Bottom 0.152: V1.2 10.83,179.48 10.83,187.59 12.99,189.75 22.89,189.75 C.9
BUSA_REGIN2
  Bottom 0.152: V1.3 10.49,176.6 10.49,191.04 11.48,192.03 15.16,192.03 24.73,192.03 25.72,191.05 25.72,189.46 C.11
BUSA_REGOUT0
  Bottom 0.152: V2.1 27.62,186.28 C.13
BUSA_REGOUT1
  Bottom 0.152: V2.2 30.16,186.28 C.15
BUSA_REGOUT2
  Bottom 0.152: V2.3 32.7,186.28 C.17
BUSB_BIT0  (via drill 0.35)
  Top 0.152: v68.58,171.04 v74.94,171.04 74.94,172.55 72.35,175.13 68.62,175.13 57.47,186.28 C.35 | v68.58,143.1 v74.94,143.1 | v74.94,157.07 v68.58,157.07 | IC18.2 28.55,110.06 v32.25,113.75 | v68.5,129 v74.94,129
  Bottom 0.152: IC6.18 57.47,167.87 59.43,169.83 60.92,169.83 61.2,170.1 67.06,170.1 68,171.04 v68.58,171.04 | IC17.18 57.47,153.9 59.43,155.86 60.92,155.86 61.2,156.13 67.06,156.13 68,157.07 v68.58,157.07 | IC14.18 57.47,139.93 59.43,141.89 60.92,141.89 61.2,142.16 67.06,142.16 68,143.1 v68.58,143.1 | IC23.18 57.47,125.96 59.43,127.92 60.92,127.92 61.2,128.19 67,128.19 67.81,129 v68.5,129 | 74.94,156.76 v74.94,143.1 v74.94,129 74.94,120.8 67.95,113.81 61.06,113.81 61,113.75 | 74.94,156.76 v74.94,171.04 | v74.94,171.04 | 74.94,156.76 v74.94,157.07 | IC2.18 57.52,110.27 61,113.75 | 48.51,113.81 61,113.81 61,113.75 | IC11.18 43.83,109.13 48.51,113.81 | 48.51,113.81 46.67,113.81 32.31,113.81 v32.25,113.75
BUSB_BIT1  (via drill 0.35, 0.35 pad 0.55)
  Top 0.152: v68.58,156.17 75.53,156.17 v75.58,156.12 | v68.58,142.2 75.54,142.2 v75.58,142.15 | v68.58,170.14 75.53,170.14 v75.58,170.09 75.55,170.12 75.55,172.37 72.48,175.44 68.74,175.44 58.45,185.73 58.45,188.6 57.47,189.58 C.36 | v61.5,113.01 v48.75,113.01 32.76,113.01 29.82,110.08 IC18.3 | v68.5,128.09 75.49,128.09 v75.58,128
  Bottom 0.152: IC6.17 58.74,168.71 59.55,169.52 61.05,169.52 61.33,169.8 67.19,169.8 67.52,170.14 v68.58,170.14 | IC17.17 58.74,154.74 59.55,155.55 61.05,155.55 61.33,155.83 67.19,155.83 67.52,156.17 v68.58,156.17 | IC14.17 58.74,140.77 59.55,141.58 61.05,141.58 61.33,141.86 67.19,141.86 67.52,142.2 v68.58,142.2 | IC23.17 58.74,126.8 59.55,127.61 61.05,127.61 61.33,127.89 68.3,127.89 v68.5,128.09 | v75.58,170.09 v75.58,156.12 75.58,142.46 v75.58,142.15 v75.58,128 75.58,120.96 68.13,113.51 62,113.51 v61.5,113.01 v61.5,113 58.79,110.29 IC2.17 | v48.75,113.01 45.24,109.5 45,109.5 45,108.87 IC11.17
BUSB_BIT2  (via drill 0.35, 0.35 pad 0.55)
  Top 0.152: v68.58,141.29 76.14,141.29 v76.22,141.2 | v68.58,155.26 76.14,155.26 v76.22,155.17 | v68.58,169.23 76.14,169.23 v76.22,169.14 76.18,169.18 76.18,172.16 72.6,175.74 68.87,175.74 60.01,184.6 C.37 | v62.25,112.4 v49.5,112.4 33.4,112.4 31.09,110.09 IC18.4 | v68.5,127.18 76.04,127.18 v76.22,127
  Bottom 0.152: IC6.16 60.01,167.9 61.57,169.46 68.17,169.46 68.41,169.23 v68.58,169.23 | IC17.16 60.01,153.93 61.57,155.49 68.17,155.49 68.41,155.26 v68.58,155.26 | IC14.16 60.01,139.96 61.57,141.52 68.17,141.52 68.41,141.29 v68.58,141.29 | IC23.16 60.01,125.98 61.57,127.55 68.14,127.55 v68.5,127.18 | v76.22,169.14 v76.22,155.17 v76.22,141.2 v76.22,127 76.22,121.17 68.25,113.2 63.05,113.2 v62.25,112.4 61.89,112.4 60.06,110.58 IC2.16 | v49.5,112.4 46.37,109.27 IC11.16
BUSB_BIT3  (via drill 0.35, 0.35 pad 0.55)
  Top 0.152: v68.58,140.38 76.7,140.38 v76.83,140.25 | v68.58,154.35 76.7,154.35 v76.83,154.22 | v68.58,168.32 76.7,168.32 v76.83,168.19 76.83,171.95 72.73,176.05 69,176.05 60.99,184.05 60.99,188.6 60.01,189.58 C.38 | v62.82,111.68 50.32,111.68 v50.25,111.75 34.25,111.75 32.37,109.86 IC18.5 | v68.5,126.27 76.84,126.27 v76.86,126.25
  Bottom 0.152: v68.58,168.32 67.75,169.15 61.91,169.15 61.28,168.52 IC6.15 | v68.58,154.35 67.75,155.18 61.91,155.18 61.28,154.55 IC17.15 | v68.58,140.38 67.75,141.21 61.91,141.21 61.28,140.58 IC14.15 | IC23.15 61.28,126.61 61.91,127.24 67.53,127.24 v68.5,126.27 | v76.83,168.19 v76.83,154.22 v76.83,140.25 76.86,140.22 v76.86,126.25 76.86,121.39 68.38,112.9 64.03,112.9 v62.82,111.68 61.33,110.2 IC2.15 | v50.25,111.75 47.63,109.14 IC11.15
BUSB_BIT4  (via drill 0.35, 0.35 pad 0.55)
  Top 0.152: v68.58,153.44 77.33,153.44 v77.51,153.26 | v68.58,139.47 77.33,139.47 v77.51,139.29 | v68.58,167.41 77.33,167.41 v77.51,167.24 77.44,167.3 77.44,171.77 72.86,176.35 69.12,176.35 62.55,182.93 C.39 | v63.33,110.92 51.16,110.92 v51,111.08 34.83,111.08 33.63,109.89 IC18.6 | v68.5,125.36 77.39,125.36 v77.51,125.25
  Bottom 0.152: IC6.14 62.55,167.9 63.5,168.85 67.14,168.85 v68.58,167.41 | IC17.14 62.55,153.93 63.5,154.88 67.14,154.88 v68.58,153.44 | IC14.14 62.55,139.96 63.5,140.91 67.14,140.91 v68.58,139.47 | IC23.14 62.55,125.98 63.5,126.94 66.93,126.94 v68.5,125.36 | v77.51,167.24 v77.51,153.26 v77.51,139.29 v77.51,125.25 77.51,121.6 68.5,112.59 65.01,112.59 v63.33,110.92 62.6,110.18 IC2.14 | IC11.14 49.14,109.01 49.14,109.36 50.85,111.08 v51,111.08
BUSB_BIT5  (via drill 0.35, 0.35 pad 0.55)
  Top 0.152: v68.58,152.53 77.93,152.53 v78.15,152.31 | v68.58,138.56 77.93,138.56 v78.15,138.34 | v68.58,166.5 77.93,166.5 v78.15,166.28 78.15,171.49 72.98,176.66 69.25,176.66 63.53,182.38 63.53,188.6 62.55,189.58 C.40 | v64,110.28 v51.75,110.28 | v51.75,110.28 | v51.75,110.28 35.78,110.28 34.91,109.41 IC18.7 | v68.5,124.46 77.94,124.46 v78.15,124.25
  Bottom 0.152: IC6.13 63.82,167.87 64.45,168.5 66.63,168.5 68.58,166.55 v68.58,166.5 | IC17.13 63.82,153.9 64.45,154.53 66.63,154.53 68.58,152.58 v68.58,152.53 | IC14.13 63.82,139.93 64.45,140.56 66.63,140.56 68.58,138.61 v68.58,138.56 | IC23.13 63.82,125.96 64.45,126.59 66.36,126.59 v68.5,124.46 | v78.15,166.28 v78.15,152.31 v78.15,138.34 v78.15,124.25 78.15,121.81 68.63,112.29 66.01,112.29 v64,110.28 63.87,110.15 IC2.13 | IC11.13 50.17,109.13 51.33,110.28 v51.75,110.28
BUSB_BIT6  (via drill 0.35, 0.35 pad 0.55)  (1 unrouted)
  Top 0.152: v68.58,137.65 78.53,137.65 v78.79,137.39 | v68.58,151.62 78.53,151.62 v78.79,151.36 | v68.58,165.59 78.53,165.59 v78.79,165.33 78.76,165.37 78.76,171.31 73.11,176.96 69.37,176.96 65.09,181.25 C.41 | v65.25,107.25 v51.5,107.25 | IC18.8 36.17,107.83 v36.75,107.25 | v68.5,123.55 78.75,123.55 v78.79,123.5
  Bottom 0.152: v68.58,165.59 67.39,166.78 67.39,167.31 66.5,168.2 65.72,168.2 65.09,167.56 IC6.12 | v68.58,151.62 67.39,152.81 67.39,153.34 66.5,154.23 65.72,154.23 65.09,153.59 IC17.12 | IC14.12 65.09,139.62 65.72,140.26 66.5,140.26 67.39,139.37 67.39,138.84 v68.58,137.65 | IC23.12 65.09,125.66 65.72,126.29 66.1,126.29 67.4,124.99 67.4,124.65 v68.5,123.55 | v78.79,165.33 v78.79,151.36 v78.79,137.39 78.79,122.02 68.76,111.99 66.74,111.99 65.18,110.43 65.18,108.82 IC2.12 65.14,107.36 v65.25,107.25 | IC11.12 51.45,107.31 v51.5,107.25 v36.75,107.25
BUSB_BIT7  (via drill 0.35, 0.35 pad 0.55)  (1 unrouted)
  Top 0.152: v68.58,136.74 79.13,136.74 v79.44,136.44 | v68.58,150.71 79.13,150.71 v79.44,150.41 | v68.58,164.68 79.13,164.68 v79.44,164.38 79.44,171.07 73.23,177.27 69.5,177.27 66.07,180.7 66.07,188.6 65.09,189.58 C.42 | IC18.9 37.45,107.45 v38.25,106.64 | v68.5,122.64 79.3,122.64 v79.44,122.5
  Bottom 0.152: IC6.11 66.95,166.32 68.58,164.69 v68.58,164.68 | IC17.11 66.95,152.35 68.58,150.72 v68.58,150.71 | IC14.11 66.95,138.38 68.58,136.75 v68.58,136.74 | v79.44,136.44 v79.44,150.41 v79.44,164.38 | 79.44,136 v79.44,136.44 | 66.41,108.48 IC2.11 | IC2.11 66.41,107.55 65.5,106.64 65,106.64 64.39,107.25 52.75,107.25 | 52.75,107.25 52.5,107.25 51.89,106.64 v38.25,106.64 | IC11.11 52.72,107.28 52.75,107.25 | IC23.11 68.13,122.64 v68.5,122.64 | IC2.11 66.41,110.34 67.75,111.68 68.88,111.68 79.44,122.23 v79.44,136.44
BUSB_BIT8  (via drill 0.35)  (3 unrouted)
  Top 0.152: v68.13,98.27 v74.49,98.27 74.49,105.64 80.04,111.19 80.04,170.89 73.36,177.57 69.63,177.57 67.63,179.57 C.43 | v68.13,70.33 v74.49,70.33 | v74.49,84.3 v68.13,84.3
  Bottom 0.152: IC33.18 57.02,95.09 58.98,97.05 60.48,97.05 60.75,97.33 66.56,97.33 67.5,98.27 v68.13,98.27 | IC36.18 57.02,81.12 58.98,83.08 60.48,83.08 60.75,83.36 66.56,83.36 67.5,84.3 v68.13,84.3 | IC39.18 57.02,67.15 58.98,69.11 60.48,69.11 60.75,69.39 66.56,69.39 67.5,70.33 v68.13,70.33 | IC42.18 57.02,53.18 58.98,55.14 60.48,55.14 60.75,55.42 68.69,55.42 74.49,61.22 v74.49,70.33 74.49,83.98 | 74.49,83.98 v74.49,98.27 | v74.49,98.27 | 74.49,83.98 v74.49,84.3
BUSB_BIT9  (via drill 0.35, 0.35 pad 0.55)  (3 unrouted)
  Top 0.152: v68.13,83.39 75.09,83.39 v75.13,83.34 | v68.13,69.42 75.09,69.42 v75.13,69.37 | v68.13,97.36 75.09,97.36 v75.13,97.31 75.13,105.34 80.35,110.56 80.35,171.02 73.49,177.88 69.75,177.88 68.61,179.02 68.61,188.6 67.63,189.58 C.44
  Bottom 0.152: IC33.17 58.29,95.93 59.1,96.75 60.6,96.75 60.88,97.02 66.69,97.02 67.02,97.36 v68.13,97.36 | IC36.17 58.29,81.96 59.1,82.78 60.6,82.78 60.88,83.05 66.69,83.05 67.02,83.39 v68.13,83.39 | IC39.17 58.29,67.99 59.1,68.81 60.6,68.81 60.88,69.08 66.69,69.08 67.02,69.42 v68.13,69.42 | IC42.17 58.29,54.02 59.1,54.84 60.6,54.84 60.88,55.11 68.82,55.11 75.13,61.42 v75.13,69.37 75.13,69.68 v75.13,83.34 v75.13,97.31
BUSB_BIT10  (via drill 0.35, 0.35 pad 0.55)  (3 unrouted)
  Top 0.152: v68.13,68.51 75.69,68.51 v75.78,68.42 | v68.13,82.48 75.69,82.48 v75.78,82.39 | v68.13,96.45 75.69,96.45 v75.78,96.36 75.78,105.56 80.65,110.43 80.65,171.14 73.61,178.18 70.8,178.18 70.17,178.82 C.45
  Bottom 0.152: IC33.16 59.56,95.12 61.12,96.68 67.73,96.68 67.96,96.45 v68.13,96.45 | IC36.16 59.56,81.15 61.12,82.71 67.73,82.71 67.96,82.48 v68.13,82.48 | IC39.16 59.56,67.18 61.12,68.74 67.73,68.74 67.96,68.51 v68.13,68.51 | IC42.16 59.56,53.21 61.12,54.77 68.91,54.77 75.78,61.63 v75.78,68.42 v75.78,82.39 v75.78,96.36
BUSB_BIT11  (via drill 0.35, 0.35 pad 0.55)  (3 unrouted)
  Top 0.152: v68.13,67.6 76.26,67.6 v76.39,67.47 | v68.13,81.57 76.26,81.57 v76.39,81.44 | v68.13,95.54 76.26,95.54 v76.39,95.41 76.39,105.74 80.96,110.31 80.96,171.27 73.74,178.49 72.07,178.49 71.15,179.41 71.15,188.6 70.17,189.58 C.46
  Bottom 0.152: v68.13,95.54 67.3,96.37 61.46,96.37 60.83,95.74 IC33.15 | v68.13,81.57 67.3,82.4 61.46,82.4 60.83,81.77 IC36.15 | v68.13,67.6 67.3,68.43 61.46,68.43 60.83,67.8 IC39.15 | IC42.15 60.83,53.83 61.46,54.46 69.04,54.46 76.42,61.84 76.42,67.44 v76.39,67.47 v76.39,81.44 v76.39,95.41
BUSB_BIT12  (via drill 0.35, 0.35 pad 0.55)  (3 unrouted)
  Top 0.152: v68.13,80.66 76.89,80.66 v77.06,80.49 | v68.13,66.69 76.89,66.69 v77.06,66.52 | v68.13,94.63 76.89,94.63 v77.06,94.46 77.06,105.98 81.26,110.18 81.26,171.4 73.87,178.79 73.34,178.79 72.71,179.43 C.47
  Bottom 0.152: IC33.14 62.1,95.12 63.05,96.07 66.69,96.07 v68.13,94.63 | IC36.14 62.1,81.15 63.05,82.1 66.69,82.1 v68.13,80.66 | IC39.14 62.1,67.18 63.05,68.13 66.69,68.13 v68.13,66.69 | IC42.14 62.1,53.21 63.05,54.16 69.16,54.16 77.06,62.05 v77.06,66.52 v77.06,80.49 v77.06,94.46
BUSB_BIT13  (via drill 0.35, 0.35 pad 0.55)  (3 unrouted)
  Top 0.152: v68.13,79.75 77.48,79.75 v77.7,79.53 | v68.13,65.78 77.48,65.78 v77.7,65.56 | v68.13,93.72 77.48,93.72 v77.7,93.5 77.7,106.19 81.57,110.06 81.57,171.52 73.69,179.4 73.69,188.6 72.71,189.58 C.48
  Bottom 0.152: IC33.13 63.37,95.09 64,95.73 66.18,95.73 68.13,93.77 v68.13,93.72 | IC36.13 63.37,81.12 64,81.76 66.18,81.76 68.13,79.8 v68.13,79.75 | IC39.13 63.37,67.15 64,67.79 66.18,67.79 68.13,65.83 v68.13,65.78 | IC42.13 63.37,53.18 64,53.82 69.25,53.82 77.7,62.27 v77.7,65.56 v77.7,79.53 v77.7,93.5
BUSB_BIT14  (via drill 0.35, 0.35 pad 0.55)  (3 unrouted)
  Top 0.152: v68.13,64.87 78.08,64.87 v78.34,64.61 | v68.13,78.84 78.08,78.84 v78.34,78.58 | v68.13,92.81 78.08,92.81 v78.34,92.55 78.34,106.4 81.87,109.93 81.87,171.65 75.25,178.27 C.49
  Bottom 0.152: v68.13,92.81 66.94,94 66.94,94.53 66.05,95.42 65.27,95.42 64.64,94.79 IC33.12 | v68.13,78.84 66.94,80.03 66.94,80.56 66.05,81.45 65.27,81.45 64.64,80.82 IC36.12 | IC39.12 64.64,66.85 65.27,67.48 66.05,67.48 66.94,66.59 66.94,66.06 v68.13,64.87 | IC42.12 64.64,52.88 65.27,53.51 69.38,53.51 78.34,62.48 v78.34,64.61 v78.34,78.58 v78.34,92.55
BUSB_BIT15  (via drill 0.35, 0.35 pad 0.55)  (3 unrouted)
  Top 0.152: v68.13,63.96 78.68,63.96 v78.99,63.66 | v68.13,77.93 78.68,77.93 v78.99,77.63 | v68.13,91.9 78.68,91.9 v78.99,91.6 78.99,106.61 82.18,109.8 82.18,171.78 76.23,177.72 76.23,188.6 75.25,189.58 C.50
  Bottom 0.152: IC33.11 66.51,93.54 68.13,91.92 v68.13,91.9 | IC36.11 66.51,79.57 68.13,77.95 v68.13,77.93 | IC39.11 66.51,65.6 68.13,63.98 v68.13,63.96 | v78.99,91.6 v78.99,77.63 v78.99,63.66 78.99,62.69 69.5,53.21 67.48,53.21 IC42.11
BUSB_REGIN0
  Top 0.152: V3.1 10.52,175.44 10.52,191.49 11.05,192.03 20.61,192.03 C.8
BUSB_REGIN1
  Top 0.152: V3.2 10.21,172.9 10.21,191.62 10.93,192.34 22.84,192.34 C.10
BUSB_REGIN2
  Top 0.152: V3.3 9.91,170.36 9.91,191.75 10.8,192.64 25.08,192.64 C.12
BUSB_REGOUT0
  Bottom 0.152: V4.1 10.19,134.51 10.19,191.16 11.35,192.33 15.03,192.33 15.05,192.35 27.91,192.35 C.14
BUSB_REGOUT1
  Bottom 0.152: V4.2 9.88,132.27 9.88,191.29 11.23,192.63 14.9,192.63 14.92,192.65 30.14,192.65 C.16
BUSB_REGOUT2
  Bottom 0.152: V4.3 12.38,127.85 9.58,130.66 9.58,191.42 11.12,192.96 32.38,192.96 C.18
CLK  (1 unrouted)
  Top 0.152: IC40.12 30.98,64.6 31.87,65.49 31.87,67.55 30.98,68.43 IC37.12 30.98,78.57 31.87,79.46 31.87,81.52 30.98,82.4 IC34.12 30.98,92.54 31.87,93.43 31.87,95.48 30.98,96.37 IC31.12 31.25,102.11 31.89,102.75 | 31.39,132.9 IC21.12 31.43,137.38 32.32,138.27 32.32,140.32 31.43,141.21 IC7.12 31.43,151.35 32.32,152.24 32.32,154.29 31.43,155.18 IC15.12 31.43,165.32 32.32,166.21 32.32,168.26 31.43,169.15 IC4.12 31.36,174.93 31.36,179.19 23.08,187.46 23.08,188.41 22.32,189.17 22.07,189.17 20.58,190.67 20.58,190.91 19.77,191.71 18.96,191.71 18.39,191.14 18.39,189.89 19.37,188.91 C.5
GND  (via drill 0.35)  (28 unrouted)
  Top 0.152: v65.91,56.36 IC41.10 | v65.91,70.33 IC38.10 65.86,65.55 v65.86,63.38 | v65.91,98.27 65.91,93.86 | 65.91,93.86 IC32.10 | v65.91,84.3 IC35.10 65.86,79.52 v65.86,77.34 | 27.94,124.38 IC21.10 IC21.11 IC7.10 IC7.11 IC15.10 IC15.11 IC4.10 IC4.11 v28.89,177.71 | IC31.11 IC31.10 28.44,88.14 | 28.44,88.14 IC34.11 | IC34.11 28.44,80.52 | 28.44,80.52 IC34.10 | IC34.10 IC37.11 | IC37.11 28.44,73.85 | 28.44,73.85 28.44,66.55 | 28.44,66.55 IC37.10 | IC37.10 28.44,60.2 | 28.44,60.2 IC40.11 | IC40.11 IC40.10 | v66.36,171.04 IC5.10 v66.36,164.06 | v66.36,157.07 IC16.10 v66.36,150.09 | v66.36,143.1 IC9.10 v66.36,136.12 | v66.36,129.13 IC22.10 | v65.86,91.31 65.86,93.8 65.91,93.86 | C.3 C.4 | V1.4 V1.5 | V3.4 V3.5 | V4.5 V4.4 12.38,125.31 10.83,126.86 10.83,132.68 16.38,138.23 V3.8 | IC4.18 46.67,184.38 V2.8 44.78,185.65 43.23,187.2 42.49,187.2 41.21,185.92 41.21,184.62 40.69,184.1 39.95,184.1 38.41,185.65 V2.5 | IC37.10 28.39,66.55 28.44,66.55 | 28.44,73.85 28.39,73.85 IC37.11 | IC34.10 28.39,80.52 28.44,80.52 | 28.44,60.2 28.39,60.2 IC40.11 | IC34.11 28.39,88.14 28.44,88.14 | IC1.10 IC1.9 IC1.8 IC1.7 IC1.6 IC1.5 IC1.4 IC1.3 IC1.2
  Bottom 0.152: v65.91,56.36 IC42.10 65.86,61.13 v65.86,63.38 | v65.91,70.33 IC39.10 65.86,75.1 v65.86,77.34 | IC37.18 44.64,72.55 30.03,72.55 IC37.11 28.39,74.14 24.93,77.6 18.47,77.6 17.59,76.71 | IC34.18 44.64,86.52 30.03,86.52 IC34.11 | v65.91,98.27 IC33.10 65.86,103.04 | IC31.18 44.64,100.49 30.03,100.49 IC31.11 | v65.91,84.3 IC36.10 65.86,89.07 v65.86,91.31 | IC15.18 45.09,159.3 30.48,159.3 IC15.11 | IC7.18 45.09,145.33 30.48,145.33 IC7.11 | IC21.18 45.09,131.36 30.48,131.36 IC21.11 | v66.36,171.04 IC6.10 66.36,176.12 65.09,177.4 47.95,177.4 45.77,179.58 29.79,179.58 29.27,179.06 29.27,178.09 v28.89,177.71 | v66.36,157.07 IC17.10 v66.36,164.06 | v66.36,143.1 IC14.10 v66.36,150.09 | v66.36,129.13 IC23.10 v66.36,136.12 | IC40.18 44.64,58.58 30.03,58.58 IC40.11 | V2.5 V2.4 34.62,185.65 33.07,184.1 20.92,184.1 C.3 | V3.4 14.41,167.82 V1.8 10.83,164.24 10.83,168.24 | 22.23,139.61 16.38,145.46 V3.8 | V3.5 10.83,159.73 10.83,140.21 11.43,139.61 22.23,139.61 | V4.5 12.38,121.53 10.83,119.98 10.83,116.08 V4.8 | IC4.18 46.05,174.85 44.5,173.31 31.06,173.31 29.52,174.85 IC4.11 | V5.7 17.59,73.55 17.59,76.71 | V1.5 10.83,165.41 10.83,164.96 | IC7.10 22.54,139.29 22.23,139.61 | V6.7 17.59,76.71 | IC2.10 IC2.9 IC2.8 IC2.7 IC2.6 IC2.5 IC2.4 IC2.3 IC2.2 55.53,118.94 55.53,119.3 55.4,119.43 54.56,119.43 53.36,118.22 IC11.10
N$1  (via drill 0.35)
  Top 0.152: v64.64,84.3 IC35.9
  Bottom 0.152: v64.64,84.3 IC36.9 64.64,89.37 63.69,90.33 43.99,90.33 41.77,88.11 IC34.16
N$2  (via drill 0.35)
  Top 0.152: v53.34,152.31 54.93,152.31 IC16.1 | v22.23,152 13.89,160.33 V1.10 | v53.48,74.17 53.48,73.53 56.02,73.53 56.33,73.85 56.33,77.03 55.06,78.3 55.06,79.25 54.74,79.57 IC35.1 | v40.14,71 34.42,71 v34.42,63.69 | v11.75,142.47 11.37,142.09 11.35,142.09 9.66,140.4 v9.66,66.55
  Bottom 0.152: v53.34,152.31 51.44,150.41 28.26,150.41 27.97,150.7 23.81,150.7 | v22.23,152 22.51,152 23.81,150.7 | v53.48,74.17 51.89,75.76 50.94,75.76 49.66,74.49 49.66,71 v40.14,71 | v34.42,63.69 34.11,64.01 V5.4 18.23,65.28 10.93,65.28 v9.66,66.55 | 23.81,150.7 20.35,147.23 18.1,147.23 13.34,142.47 v11.75,142.47
N$3  (via drill 0.35)  (1 unrouted)
  Top 0.152: v55.38,91 55.38,89.41 55.7,89.09 IC35.19 | v55.88,163.74 55.88,162.16 56.2,161.84 IC16.19 | v23.81,135.17 22.81,134.17 | v19.37,135.17 17.14,137.39 17.14,140.04 16.83,140.36 v16.83,166.92
  Bottom 0.152: v55.38,91 55.06,90.68 26.8,90.68 25.85,89.73 | V6.4 13.15,83.06 20.45,83.06 25.85,88.46 25.85,89.73 | v55.88,163.74 55.56,163.43 24.13,163.43 20.64,166.92 18.73,166.92 17.78,167.87 | 17.78,167.87 16.83,168.82 16.83,176.44 41.27,176.44 V2.10 | 25.85,89.73 23.63,91.95 v23.31,91.95 | v19.37,135.17 v23.81,135.17 | 17.78,167.87 v16.83,166.92
N$4  (via drill 0.35)  (1 unrouted)
  Top 0.152: v42.23,162.79 IC4.3 | v26.04,162.47 25.08,161.52 25.08,142.15 v21.91,138.98 | 22.18,136.07 v23.5,137.39
  Bottom 0.152: IC31.2 IC31.3 44.67,92.9 22.68,92.9 | IC4.2 IC4.3 | V6.3 17.91,92.9 22.68,92.9 | v42.23,162.79 41.91,162.47 v26.04,162.47 | v23.5,137.39 v21.91,138.98 | 22.68,92.9 v22.68,93.22
N$5  (via drill 0.35)
  Top 0.152: v56.2,171.04 IC5.2
  Bottom 0.152: IC6.2 v56.2,171.04 40.32,171.04 IC4.7
N$6  (via drill 0.35)
  Top 0.152: IC5.3 v57.47,171.04 55.88,172.63 35.56,172.63 33.97,174.22 IC4.13
  Bottom 0.152: v57.47,171.04 IC6.3
N$7  (via drill 0.35)
  Top 0.152: v58.74,171.04 IC5.4
  Bottom 0.152: IC6.4 v58.74,171.04 58.1,170.41 42.23,170.41 IC4.6
N$8  (via drill 0.35)
  Top 0.152: IC5.5 v60.01,171.04 58.1,172.95 37.78,172.95 36.51,174.22 IC4.14
  Bottom 0.152: IC6.5 v60.01,171.04
N$9  (via drill 0.35)
  Top 0.152: v61.28,171.04 IC5.6
  Bottom 0.152: IC6.6 v61.28,171.04 60.67,170.44 58.77,170.44 58.1,169.78 44.13,169.78 IC4.5
N$10  (via drill 0.35)
  Top 0.152: IC5.7 v62.55,171.04 62.14,171.04 61.53,171.65 59.83,171.65 58.23,173.25 40.65,173.25 IC4.15
  Bottom 0.152: IC6.7 v62.55,171.04
N$11  (via drill 0.35)
  Top 0.152: v63.82,171.04 IC5.8
  Bottom 0.152: IC6.8 v63.82,171.04 63.18,170.41 61.07,170.41 60.8,170.13 59.1,170.13 58.1,169.14 46.04,169.14 IC4.4
N$12  (via drill 0.35)  (1 unrouted)
  Top 0.152: v53.5,165.65 54.26,165.65 IC5.1 | v53.48,93.54 54.43,93.54 IC32.1 | v34.74,91.31 32.52,89.09 32.52,78.93 32.84,78.61 32.84,75.44 32.2,74.81 v32.2,57.66 | V1.11 24.45,150.43 v24.45,147.23 | v33.02,143.74 33.02,137.39 33.34,137.07 33.34,134.53 32.02,133.22
  Bottom 0.152: V1.11 14.82,165.69 28.85,165.69 28.89,165.65 v53.5,165.65 | v53.48,93.54 51.25,91.31 v34.74,91.31 | v32.2,57.66 31.25,56.71 19.82,56.71 V5.1 | v24.45,147.23 27.94,143.74 v33.02,143.74
N$13  (1 unrouted)
N$14  (via drill 0.35)  (1 unrouted)
  Top 0.152: 56.83,165.01 55.56,165.01 55.56,169.78 53.02,172.31 33.02,172.31 33.02,176.12 33.34,176.44 40.32,176.44 V2.11 | 56.83,165.01 62.87,165.01 63.18,165.33 63.18,172 60.33,172 58.74,173.59 57.78,173.59 56.83,174.54 56.83,174.85 56.2,175.49 IC5.19 | 55.06,103.7 55.7,103.06 IC32.19 | v14.61,113.89 15.11,113.39 15.11,97.39 11.88,94.17 V6.1 | 56.83,165.01 56.83,160.57 57.78,159.62 58.74,159.62 60.33,158.03 63.18,158.03 v63.18,150.72 | v65.72,144.06 64.45,144.06 64.45,137.39 62.23,135.17 56.83,135.17 56.83,132.63 57.78,131.68 58.42,131.68 60.01,130.09 63.18,130.09 63.18,123.42 62.87,123.1 v53.34,123.1
  Bottom 0.152: v53.34,123.1 52.89,122.65 22.73,122.65 20.64,120.56 18.73,120.56 14.61,116.44 v14.61,113.89 | v63.18,150.72 64.77,149.14 65.41,149.14 65.72,148.82 v65.72,144.06
N$15  (via drill 0.35)
  Top 0.152: IC5.9 v65.09,171.04
  Bottom 0.152: v65.09,171.04 IC6.9 65.09,176.12 64.13,177.08 54.61,177.08 53.94,176.4 43.76,176.4 42.22,174.85 IC4.16
N$17  (via drill 0.35)  (1 unrouted)
  Top 0.152: V4.11 20.59,119.02 | v26.04,164.06 25.08,163.11 v25.08,162.79 | v9.53,115.17 9.84,115.48 9.84,143.42 11.11,144.69 13.65,144.69 15.89,146.93 15.89,156.11 v14.92,157.07
  Bottom 0.152: V6.2 15.69,93.22 15.69,113.26 | V4.11 16.19,115.8 16.19,113.26 15.69,113.26 | v21.09,90.68 23,92.58 51.57,92.58 53.79,94.81 55.7,94.81 55.7,93.86 IC33.19 | IC6.19 56.2,167.55 54.29,167.55 54.29,164.06 v26.04,164.06 | v25.08,162.79 21.91,159.62 15.97,159.62 14.92,158.57 v14.92,157.07 | v9.53,115.17 11.43,113.26 15.69,113.26
N$18  (via drill 0.35, 0.35 pad 0.55)  (1 unrouted)
  Top 0.152: v38.6,84.3 47.49,84.3 IC34.1 | IC15.1 47.94,157.07 v39.37,157.07 | V5.6 21.09,70.68 v21.09,82.74 | v17.78,158.98 18.1,158.66 v18.1,138.03 | v26.99,136.75 26.62,136.39 | v27.44,89.73 27.12,90.05
  Bottom 0.152: IC34.19 48.14,88.11 45.96,85.92 40.23,85.92 v38.6,84.3 38.55,84.01 27.44,84.01 | IC15.19 47.31,158.98 41.27,158.98 v39.37,157.07 37.47,158.98 v17.78,158.98 | v21.09,82.74 22.36,84.01 27.44,84.01 | v18.1,138.03 19.37,136.75 v26.99,136.75 | 27.44,84.01 v27.44,89.73
N$19  (via drill 0.35)
  Top 0.152: v43,77.03 46.17,80.2 IC34.3 | v14.61,151.04 13.65,150.09 11.11,150.09 7.77,146.75 7.77,82.75 v7.44,82.42
  Bottom 0.152: IC34.2 IC34.3 | IC15.2 IC15.3 45.09,151.68 27.3,151.68 26.35,152.63 16.19,152.63 v14.61,151.04 | v43,77.03 41.73,78.3 33.06,78.3 32.45,77.69 31.95,77.69 31.34,78.3 12.84,78.3 V6.6 8.71,82.42 v7.44,82.42
N$20  (via drill 0.35)  (1 unrouted)
  Top 0.152: v38.6,98.27 47.49,98.27 IC31.1 | v39.05,171.04 47.94,171.04 IC4.1 | V5.3 26.8,68.77 26.8,85.92 26.17,86.55 v26.17,97.67 | v17.78,168.82 16.19,167.24 16.19,140.56 16.83,139.93 v16.83,136.75 | 25.67,134.17 v26.67,135.17
  Bottom 0.152: IC31.19 48.14,102.08 45.96,99.89 40.23,99.89 v38.6,98.27 37.3,99.57 28.07,99.57 v26.17,97.67 | IC4.19 48.59,174.85 46.41,172.67 40.68,172.67 v39.05,171.04 36.83,168.82 v17.78,168.82 | v16.83,136.75 17.78,135.8 26.04,135.8 v26.67,135.17
N$22  (via drill 0.35)
  Top 0.152: v56.2,143.1 IC9.2
  Bottom 0.152: IC14.2 v56.2,143.1 40.32,143.1 IC7.7
N$23  (via drill 0.35)
  Top 0.152: IC9.3 v57.47,143.1 55.88,144.69 35.56,144.69 33.97,146.28 IC7.13
  Bottom 0.152: v57.47,143.1 IC14.3
N$24  (via drill 0.35)
  Top 0.152: v58.74,143.1 IC9.4
  Bottom 0.152: IC14.4 v58.74,143.1 58.1,142.47 42.23,142.47 IC7.6
N$25  (via drill 0.35)
  Top 0.152: IC9.5 v60.01,143.1 58.1,145.01 37.78,145.01 36.51,146.28 IC7.14
  Bottom 0.152: IC14.5 v60.01,143.1
N$26  (via drill 0.35)  (1 unrouted)
  Top 0.152: v41.27,158.03 37.78,158.03 v37.78,148.82 | v40.14,84.97 34.42,84.97 v34.42,76.39 | 25.04,138.93 v26.04,139.93 | 25.54,71.63 26.49,70.68 26.49,70.04 23,66.55 V5.5
  Bottom 0.152: v41.27,158.03 50.16,158.03 50.16,161.52 51.12,162.47 54.29,162.47 54.93,161.84 IC17.1 | v37.78,148.82 37.47,148.5 24.45,148.5 20.64,144.69 24,144.69 V3.10 26.04,158.17 v26.04,139.93 | v40.14,84.97 49.66,84.97 49.66,88.46 50.94,89.73 53.79,89.73 54.43,89.09 IC36.1 | V5.5 18.55,67.5 11.25,67.5 7.15,71.6 7.15,73.89 11.16,77.9 25.06,77.9 26.57,76.39 v34.42,76.39
N$27  (via drill 0.35)  (1 unrouted)
  Top 0.152: v26.04,143.1 v26.04,150.09 | 27.94,139.61 v27.62,139.93
  Bottom 0.152: IC36.19 55.03,80.29 55.03,80.64 54.9,80.78 53.51,80.78 51.67,78.94 22.04,78.94 20.46,80.52 13.15,80.52 V6.5 10.33,83.34 10.33,87.24 11.62,88.52 12.91,88.52 16.01,91.62 16.01,113.08 V4.10 | IC17.19 56.2,153.58 54.29,153.58 53.98,153.26 53.98,151.36 52.7,150.09 v26.04,150.09 | v26.04,143.1 26.04,140.56 26.35,140.56 26.99,139.93 v27.62,139.93
N$28  (via drill 0.35)
  Top 0.152: v61.28,143.1 IC9.6
  Bottom 0.152: IC14.6 v61.28,143.1 60.67,142.5 58.77,142.5 58.1,141.84 44.13,141.84 IC7.5
N$29  (via drill 0.35)
  Top 0.152: V5.10 11.88,67.17 10.33,68.72 10.33,119.48 12.12,121.26 13.41,121.26 13.93,121.78 13.93,125.62 19.74,131.42 21.03,131.42 21.55,131.94 21.55,155.21 V3.9 | v54.43,71 53.48,70.04 v53.48,66.55 | v54.93,143.74 53.98,142.79 v53.98,139.29
  Bottom 0.152: v54.43,71 54.43,74.81 IC39.1 | v53.48,66.55 53.79,66.23 53.79,64.33 21.41,64.33 20.14,65.6 12.84,65.6 V5.10 | v54.93,143.74 IC14.1 | v53.98,139.29 50.8,136.12 18.73,136.12 17.14,137.71 17.14,157.66 V3.9
N$30  (via drill 0.35)  (1 unrouted)
  Top 0.152: v38.6,70.33 47.49,70.33 IC37.1 | v39.05,143.1 47.94,143.1 IC7.1 | 21.38,136.2 v28.29,143.1 | v25.85,70.36 23,70.36 v21.88,71.47 21.88,87.55 22.68,88.34 22.68,90.68 21.88,91.47
  Bottom 0.152: IC37.19 48.14,74.14 45.96,71.95 40.23,71.95 v38.6,70.33 25.89,70.33 v25.85,70.36 | IC7.19 48.59,146.91 46.41,144.73 40.68,144.73 v39.05,143.1 v28.29,143.1 | V5.8 12.84,70.68 21.09,70.68 v21.88,71.47
N$31  (via drill 0.35)  (1 unrouted)
  Top 0.152: IC7.2 50.48,138.03 v50.48,131.99 | v34.61,129.77 v40.64,129.77 | 24.08,125.59 v25.4,126.91
  Bottom 0.152: IC37.2 IC37.3 44.67,64.96 28.08,64.96 27.55,65.49 27.55,67.39 22.36,72.58 23,73.22 | IC7.2 IC7.3 | V6.8 23,73.22 | v50.48,131.99 48.26,129.77 v40.64,129.77 | v34.61,129.77 31.75,126.91 v25.4,126.91 | 23,73.22 v24.58,74.81
N$32  (via drill 0.35)
  Top 0.152: v44.9,61.47 44.27,62.1 v33.16,62.1 | v34.92,134.53 v45.09,134.53 | V3.7 13.97,157.79 13.97,137.39 v16.83,134.53 16.83,129.45 v13.34,125.96
  Bottom 0.152: v44.9,61.47 45.22,61.79 53.79,61.79 54.43,61.15 IC42.1 | v33.16,62.1 32.84,62.42 15.38,62.42 | V5.13 15.38,62.42 | v45.09,134.53 54.29,134.53 54.93,133.9 IC23.1 | v16.83,134.53 v34.92,134.53 | 15.38,62.42 15.38,64.96 10.29,64.96 6.8,68.45 6.8,122.19 10.57,125.96 v13.34,125.96
N$33  (via drill 0.35)